# Altium PCB Mixer10_7M.PcbDoc
Units mm, origin at the board's own origin, x right, y up, seen from the top; angles counter-clockwise.
Board outline 30 x 25 mm, 2 copper layers (Top Layer, Bottom Layer); 15 components, 8 nets, 32 pads, 2 vias.
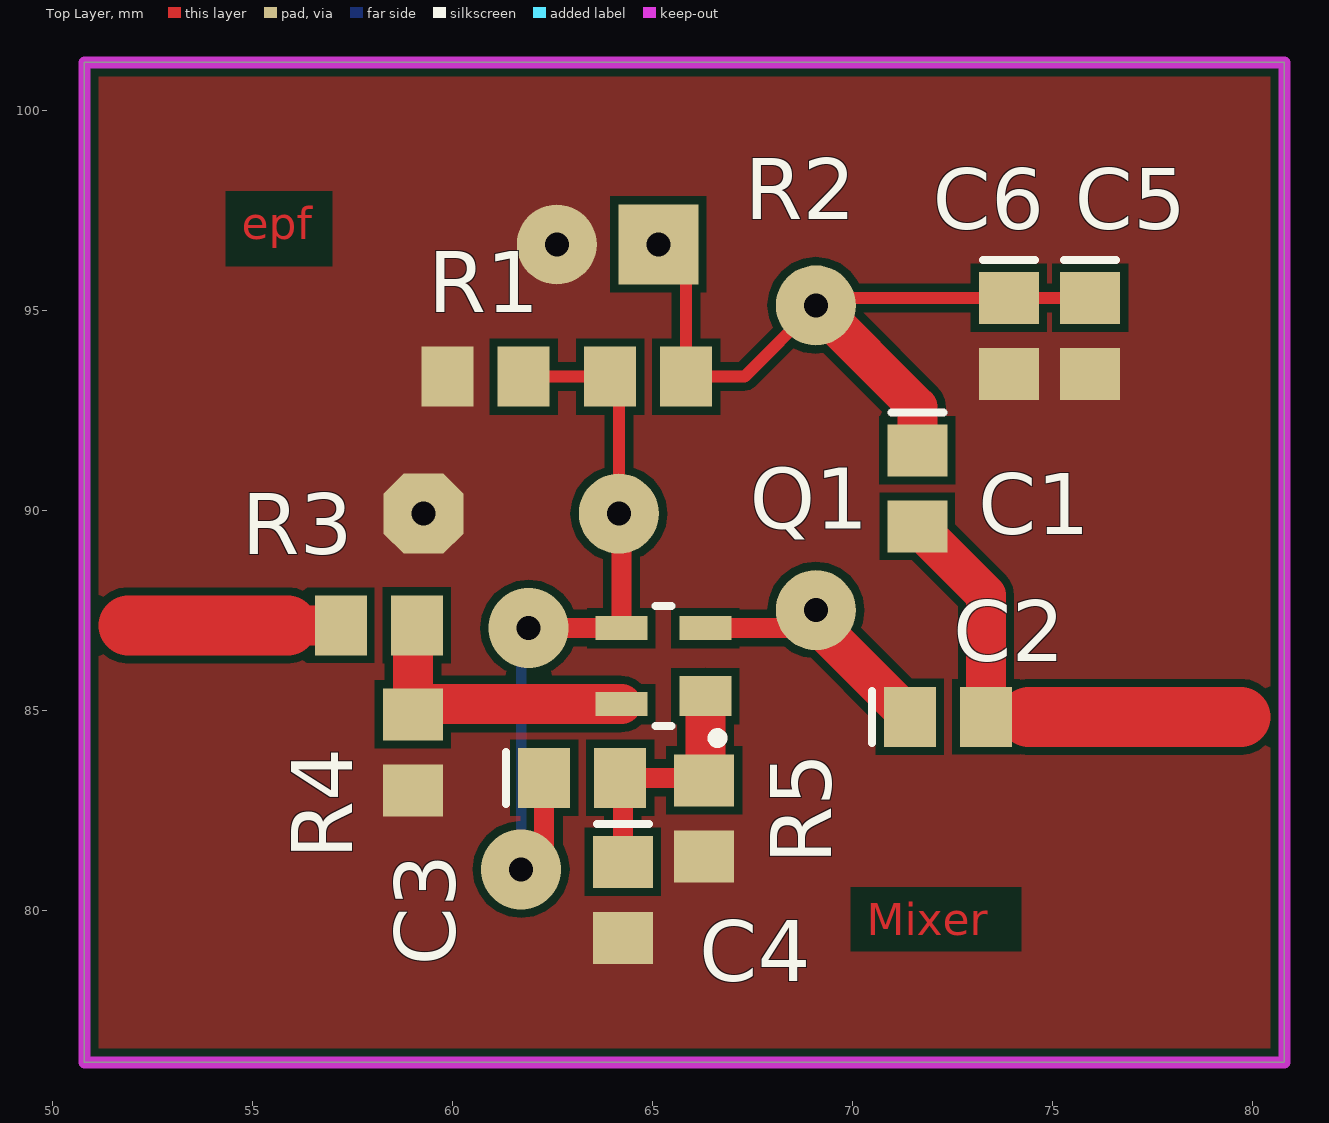
[diagram p0: Top Layer view]
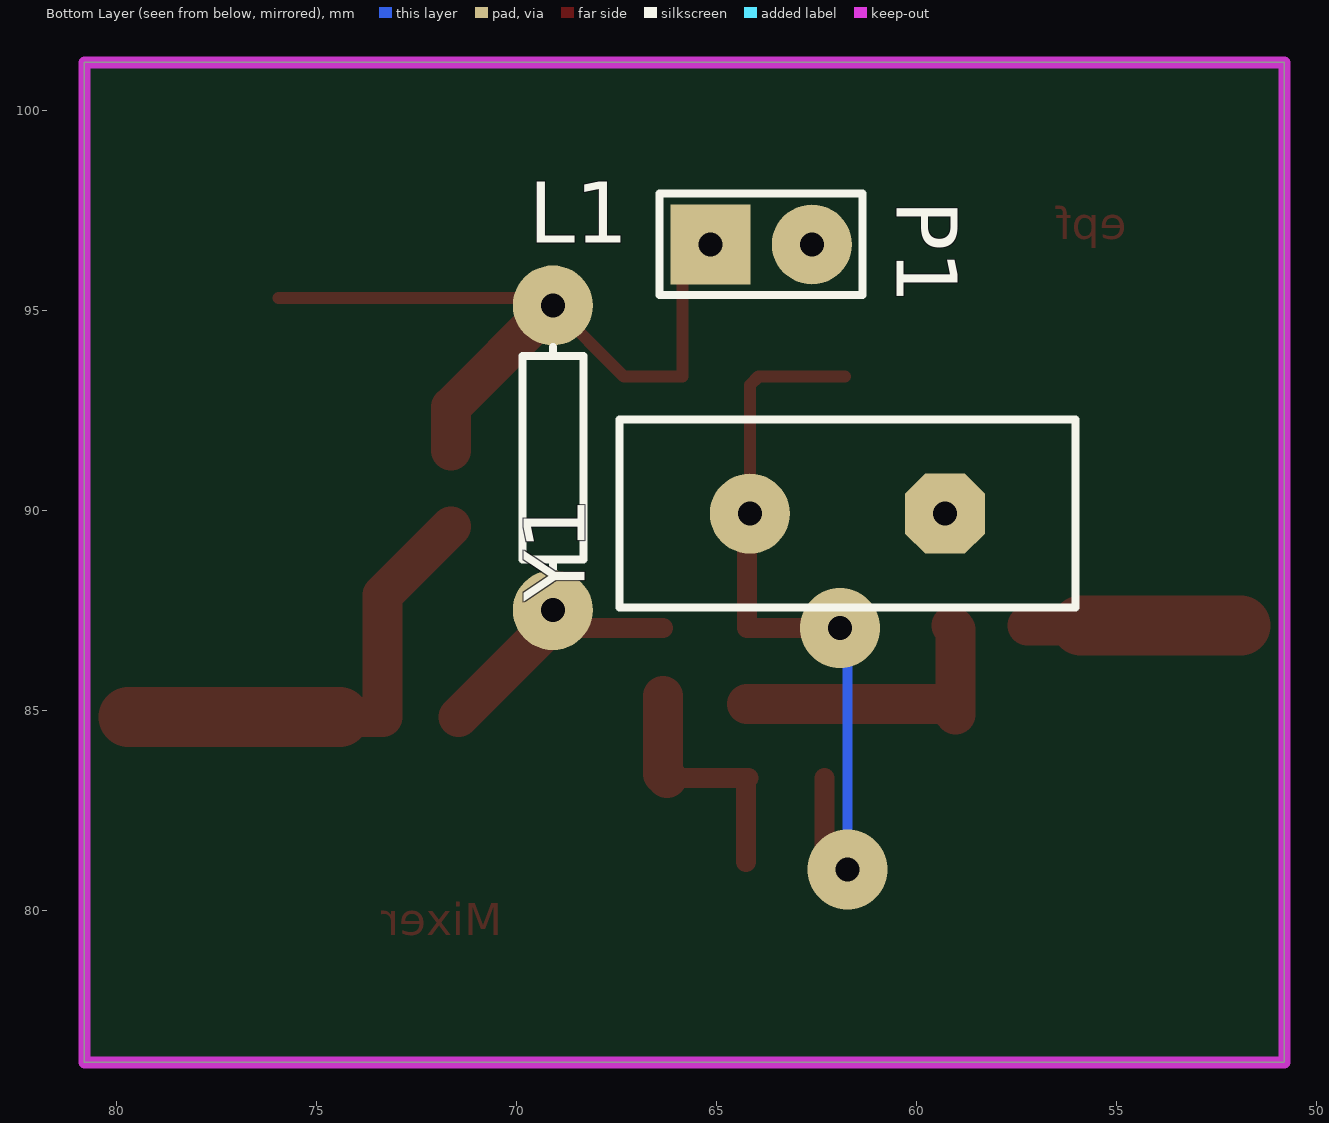
[diagram p1: Bottom Layer view, seen from below]

## Layer stack, top to bottom
Top Layer: signal copper 0.0356
Dielectric: dielectric 0.32, FR-4, Dk 4.8
Bottom Layer: signal copper 0.0356

## Board outline
50.8,76.2 80.8,76.2 80.8,101.2 50.8,101.2

## Design rules (kind name [scope] priority, off if disabled: settings)
Clearance [All] p1: gap=0.2
PolygonConnect [All] p1: connectstyle=Direct reliefconductorwidth=0.254 reliefentries=4 polygonreliefangle="90 Angle"
RoomDefinition Mixer10_7M [InComponentClass('Mixer10_7M')] p1: confinementstyle=ConfineIn formatcopy=TRUE lockcomponents=FALSE outline 50.8,75.819 81.28,75.819 81.28,101.2 50.8,101.2
RoutingVias [All] p1: holewidth=0.6 width=2 viastyle="Through Hole" minholewidth=0.6 minwidth=1.27 maxholewidth=1 maxwidth=3
SilkscreenOverComponentPads [All] p1: minsilkscreentomaskgap=0.254
SolderMaskExpansion [All] p1: expansion=0.102
TestPointUsage [All] p1: valid=0 allowmultiple=FALSE
Testpoint [All] p1: side=15 testpointundercomponent=TRUE minsize=1.016 maxsize=2.54 preferedsize=1.524 minholesize=0 maxholesize=1.016 preferedholesize=0.813 testpointgrid=0.025 style=1023 order=0123456789
Width [All] p1: maxlimit=3 minlimit=0.2 preferedwidth=1
23 further rules are at their usual default settings.

## Components (designator, comment, footprint, x,y, rotation, side; value= is the part's Value field where it differs from the comment)
C1 "Cap Pol3" C0805 71.628,90.551 r270 top
C2 "Cap Pol3" C0805 72.39,84.836 r0 top
C3 "Cap Pol3" C0805 63.246,83.312 r0 top
C4 "Cap Pol3" C0805 64.262,80.264 r270 top
C5 "Cap Pol3" C0805 75.946,94.361 r270 top
C6 "Cap Pol3" C0805 73.914,94.361 r270 top
L1 "Res1" AXIAL-0.3 69.088,91.313 r90 bottom
P1 "Header 2" HDR1X2 65.151,96.647 r180 bottom
Q1 "BF998" SOT143_N 65.278,86.106 r180 top
R1 "Res Semi" 2012[0805] 60.833,93.345 r0 top
R2 "Res Semi" 2012[0805] 64.897,93.345 r0 top
R3 "Res Semi" 2012[0805] 58.166,87.122 r180 top
R4 "Res Semi" 2012[0805] 59.016,83.947 r90 top
R5 "Res Semi" 2012[0805] 66.294,82.296 r90 top
Y1 "ECS-10-13-1" HC-49U 61.722,89.916 r0 bottom

## Footprints (in the part's own frame and the unit in brackets; to place one, negate y for a bottom-side part, rotate by r counter-clockwise, add the part's x,y. Pads: shape width x height; smd on the part's side, far side on the other; paste and mask are expansions set on the pad)
2012[0805] [mm] "Chip Resistor; Body 2.0 x 1.3 mm (LxW typ)"
  rect 1.3x1.5 smd: 1(-0.95,0) 2(0.95,0)
AXIAL-0.3 [mm] "Resistor; 2 Leads"
  round 2 hole 0.6: 1(-3.81,0) 2(3.81,0)
  silkscreen extent -2.77,-0.76 2.77,0.76
C0805 [mm] "Chip Capacitor; Body 2.0 x 1.2 mm (LxW typ)"
  rect 1.3x1.5 smd: 1(-0.95,0) 2(0.95,0)
  silkscreen extent -1.9,-0.65 -1.9,0.65
HC-49U [mm] "Quartz Crystal, Thru-Hole; 2 Leads; Body 11.35 x 4.65 x 13.46 mm (LxWxH max)"
  oct 2x2 hole 0.6: 1(-2.44,0)
  round 2 hole 0.6: 2(2.44,0)
  silkscreen extent -5.7,-2.35 5.7,2.35
HDR1X2 [mm] "Connector; Header; 2 Position"
  rect 2x2 hole 0.6: 1(0,0)
  round 2 hole 0.6: 2(2.54,0)
  silkscreen extent -1.27,-1.27 3.81,1.27
SOT143_N [mm] "SOT143, 4-Leads, Body 2.9x1.3mm, Pitch 1.9mm, Lead Span 2.3mm, IPC Medium Density"
  rect 1.3x1 smd: 1(-1.05,0.75)
  rect 1.3x0.6 smd: 2(-1.05,-0.95) 3(1.05,-0.95) 4(1.05,0.95)
  silkscreen extent -1.48,-1.5 0.2,1.92, body extent -0.7,-1.52 0.7,1.52, height 1.1

## Part data
C1 C2 C3 C4 C5 C6: "Polarized Capacitor (Surface Mount)"
L1: "Resistor"
P1: "Header, 2-Pin"
Q1: "Silicon N-channel Dual-gate MOSFET"
R1 R2 R3 R4 R5: "Semiconductor Resistor"
Y1: "Crystal Oscillator"

## Via types
v1: diameter 2, hole 0.6, Top Layer to Bottom Layer, 2 vias

## Nets (pads, with @x,y where several pads share a name; then routed paths per layer and width w, separated by ;. In a path a pad name is that pad's centre, name@x,y a point inside that pad or via, vN(x,y) a via of type N, cw(c..) or ccw(c..) an arc to the next point about the centre after c; other vN are vias at no path point)
GND: C4.2 C5.2 C6.2 P1.2 R1.1 R4.1 R5.1 Y1.1
IN: R3.2 | length 5.3
  Top Layer w1: 55.88,87.122 R3.2
  Top Layer w1.5: 51.9,87.122 55.88,87.122
NetC2_1: C2.1 L1.1 Q1.2 | length 6.6
  Top Layer w0.5: Q1.2 68.641,87.056 L1.1
  Top Layer w1: L1.1 69.088,87.188 C2.1
NetC3_1: C3.1 Q1.3 R1.2 R2.1 Y1.2 | length 19.5
  Top Layer w0.3: R1.2 R2.1 64.162,93.13 Y1.2
  Top Layer w0.5: v1(61.722,81.026) 62.296,81.6 C3.1 ; v1(61.91,87.056) Q1.3 64.228,89.85 Y1.2
  Bottom Layer w0.254: v1(61.722,81.026) 61.722,86.868 v1(61.91,87.056)
NetC3_2: C3.2 C4.1 Q1.1 R5.2 | length 6.3
  Top Layer w0.5: C4.1 64.262,83.246 C3.2 66.228,83.312 R5.2
  Top Layer w1: R5.2@66.228,83.312 66.328,83.412 Q1.1
NetQ1_4: Q1.4 R3.1 R4.2 | length 7.6
  Top Layer w1: R3.1 59.016,87.022 R4.2 59.275,85.156 Q1.4
OUT: C1.2 C2.2 | length 11.8
  Top Layer w1: C1.2 73.34,87.889 C2.2 74.422,84.836
  Top Layer w1.5: 74.422,84.836 79.7,84.836
VCC: C1.1 C5.1 C6.1 L1.2 P1.1 R2.2 | length 19.2
  Top Layer w0.3: P1.1 65.847,95.951 R2.2 67.31,93.345 L1.2 69.276,95.311 C6.1 C5.1
  Top Layer w1: L1.2 71.628,92.583 C1.1

## Polygon pours and split planes (outlines as drawn)
GND on Top Layer "Top Layer-GND" (solid, remove dead copper): 50.8,101.2 50.8,76.2 80.8,76.2 80.8,101.2

## Keep-outs
Keep-Out Layer:
  the board outline again, w0.3

## Other copper
Top Layer:
  text "epf" at 54.737,96.774 h0.8
  text "Mixer" at 70.358,79.375 h0.8

## Silkscreen, mask and mechanical layers (free items; w line width, h text height)
Drill Drawing:
  text ".LEGEND" at 85.88,81.28 h1.52
  text "Drill Drawing." at 85.88,78.74 h1.52

## Dimensions
50.8,76.2 to 50.8,101.2 on Mechanical 1
50.8,76.2 to 80.8,76.2 on Mechanical 1